# Altium PCB PCB.PcbDoc
Units mil, origin at the board's own origin, x right, y up, seen from the top; angles counter-clockwise.
Board outline 3290 x 2165 mil, 2 copper layers (Top Layer, Bottom Layer); 27 components, 32 nets, 114 pads, 2 vias.
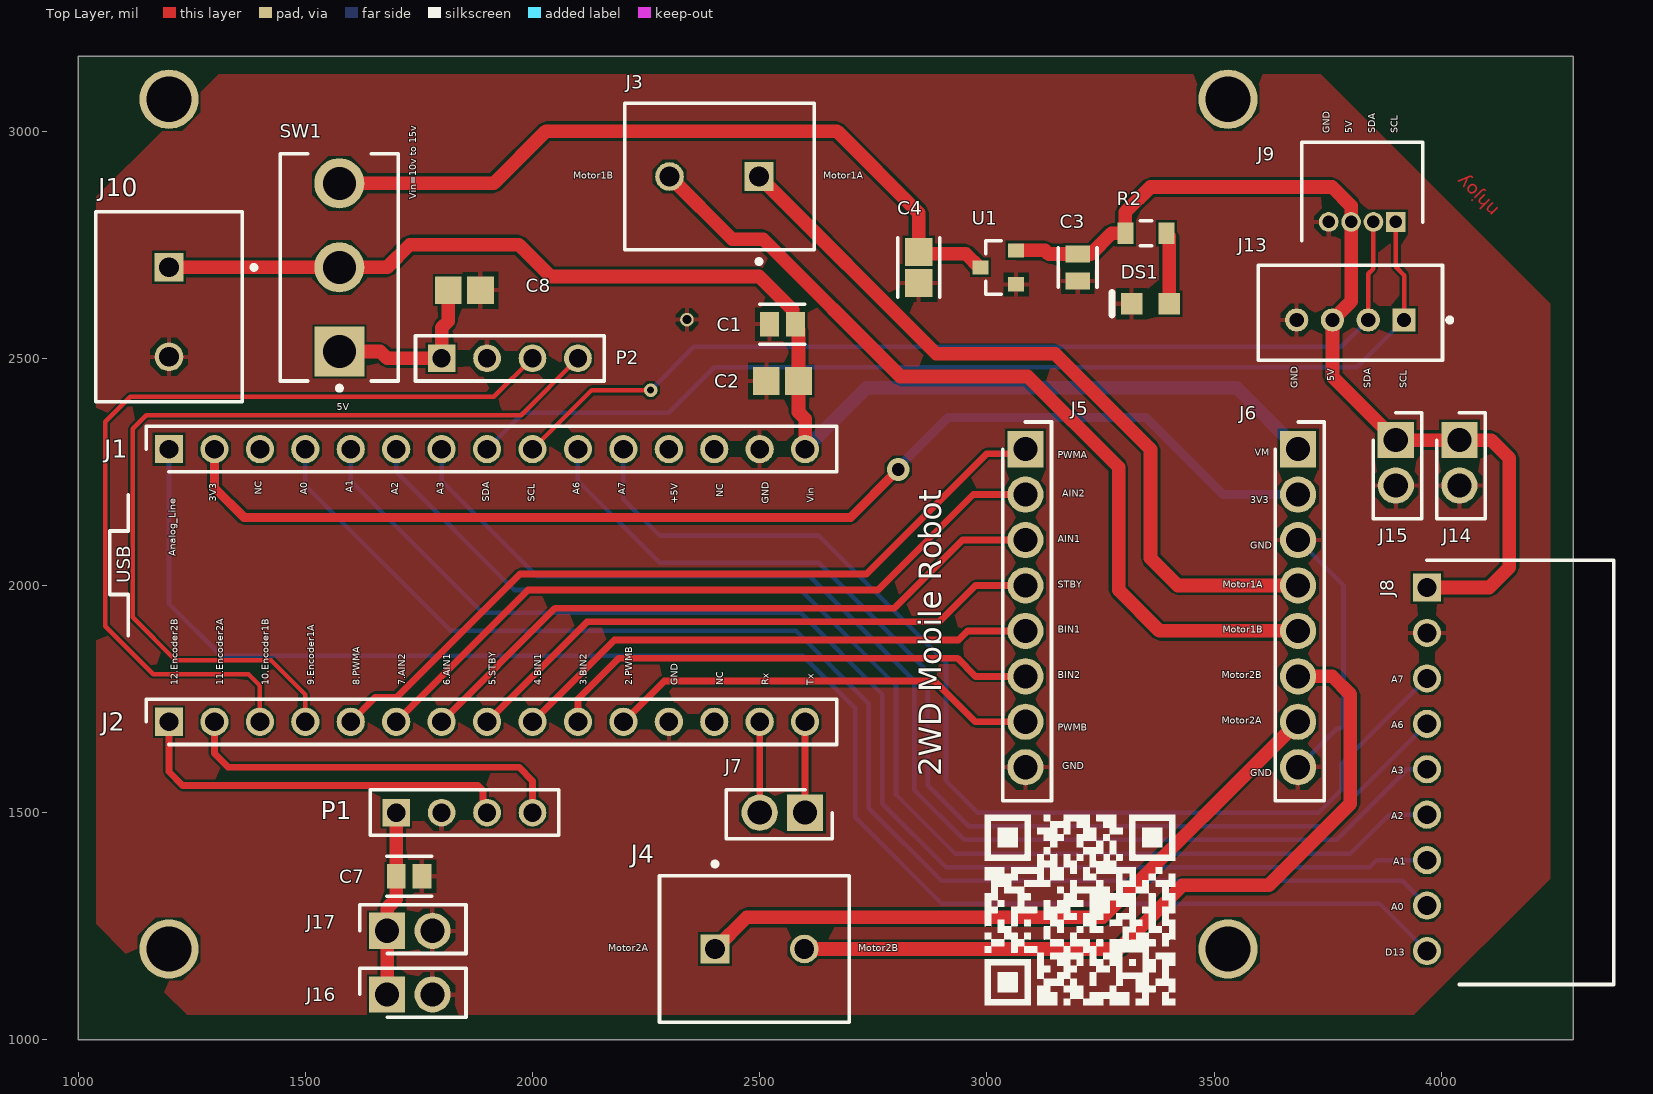
[diagram p0: Top Layer view]
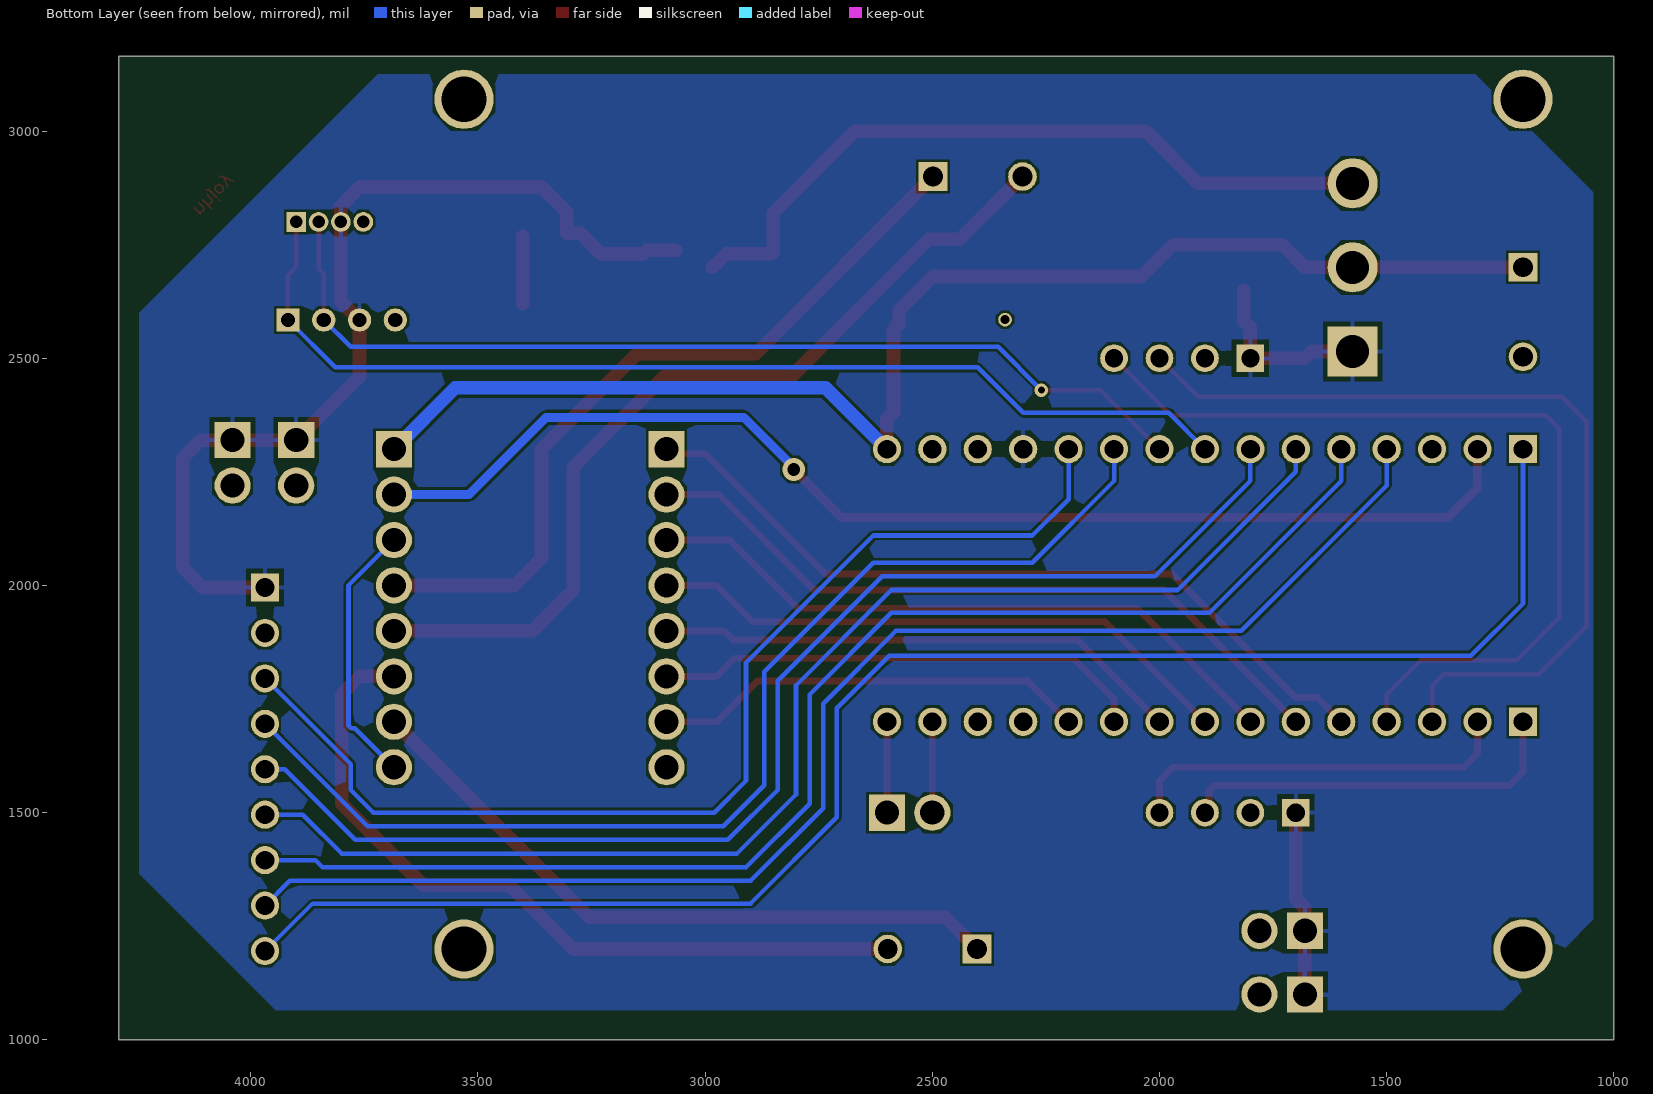
[diagram p1: Bottom Layer view, seen from below]
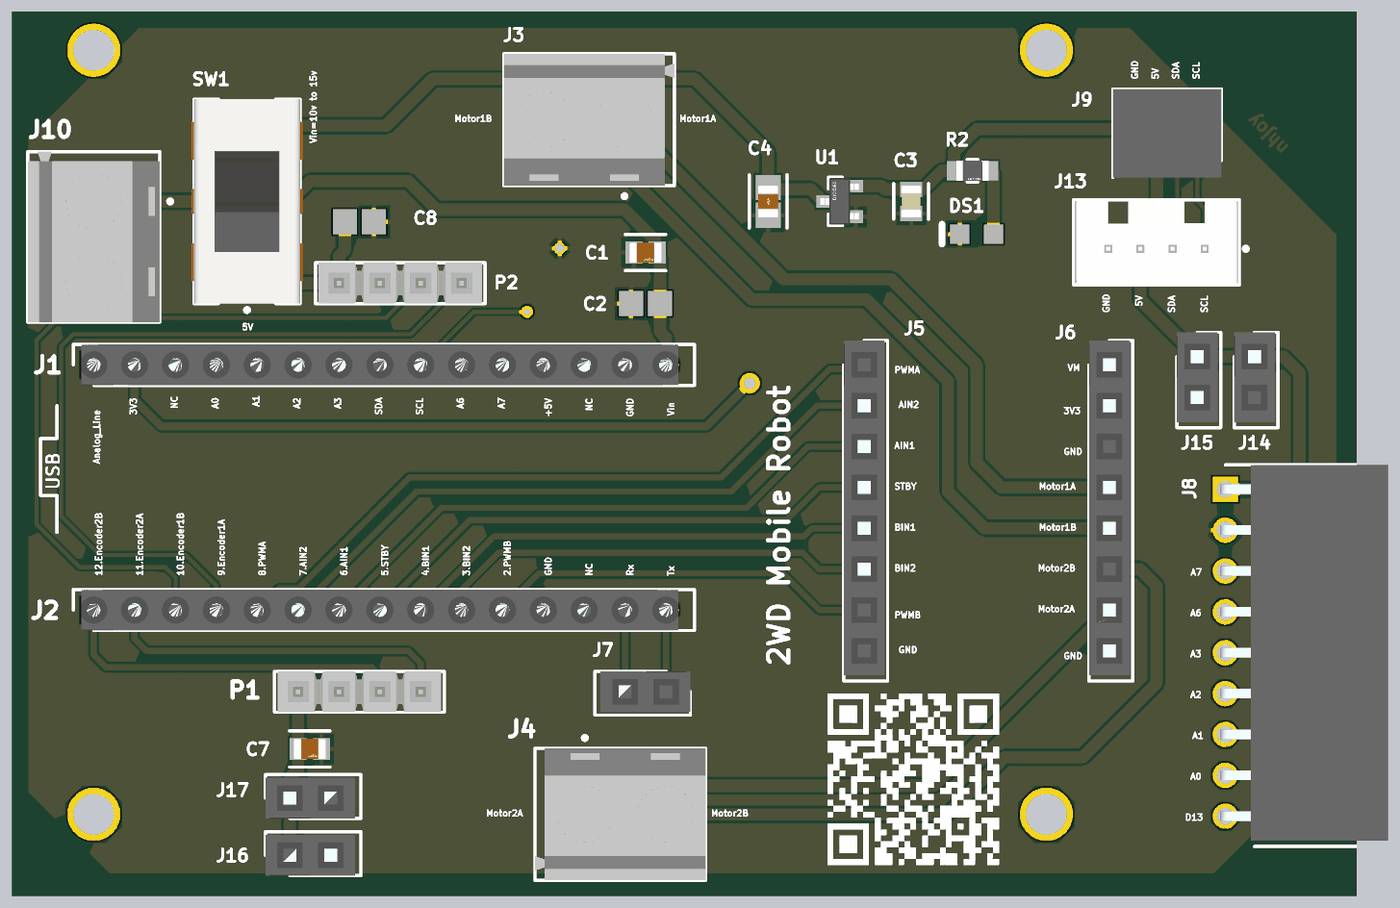
[diagram p2: 3D render of the assembled board from above, using the file's embedded part models]

## Layer stack, top to bottom
Top Solder: solder mask 0.4, Solder Resist, Dk 3.5
Top Layer: signal copper 1.4
Dielectric 1: dielectric 12.6, FR-4, Dk 4.8
Bottom Layer: signal copper 1.4
Bottom Solder: solder mask 0.4, Solder Resist, Dk 3.5

## Board outline
1000,1000 4290,1000 4290,3165 1000,3165

## Design rules (kind name [scope] priority, off if disabled: settings)
Clearance [All] p1: gap=5 ignorepadtopadclearanceinfootprint=TRUE
MinimumAnnularRing [All] p1: minimumring=3
MinimumSolderMaskSliver [All] p1: minsoldermaskwidth=3
PolygonConnect [All] p1: connectstyle=Relief reliefconductorwidth=10 reliefentries=4 polygonreliefangle="90 Angle" airgapwidth=10
RoutingVias [All] p1: holewidth=28 width=50 viastyle="Through Hole" minholewidth=28 minwidth=50 maxholewidth=28 maxwidth=50
ShortCircuit ShortCircuit_1 [All] p1: allowed=FALSE
ShortCircuit [All] p2: allowed=FALSE
SilkToSilkClearance [All] p1: silktosilkclearance=5
SilkToSolderMaskClearance [IsPad] p1: minsilkscreentomaskgap=5 clearancetoexposedcopper=TRUE
SolderMaskExpansion [All] p1: expansion=4 istentingtop=FALSE
Width [All] p1: maxlimit=30 minlimit=10 preferedwidth=15
26 further rules are at their usual default settings.

## Classes and differential pairs
component class Power: C3 C4 DS1 J10 J14 J15 J16 J17 R2 SW1 U1
component class Main: C1 C2 C7 C8 J2 J3 J4 J5 J6 J7 J8 J9 J13 P1 P2

## Components (designator, comment, footprint, x,y, rotation, side; value= is the part's Value field where it differs from the comment)
C1 "10uF" FP-GRM21B-0_2-e0_2_0_7-IPC_C 2550,2575 r0 top
C2 "0.1 µF" CAPC2013X140X50ML20T25 2550,2450 r180 top
C3 "10uF, 10V" FP-C0805C-DG-MFG 3200,2700 r270 top value=10uF
C4 "1uF, 50V" FP-C2012-125-0_2-IPC_A 2850,2700 r270 top
C7 "10uF" FP-GRM21B-0_2-e0_2_0_7-IPC_C 1728.57,1360 r0 top
C8 "0.1 µF" CAPC2013X140X50ML20T25 1850,2650 r180 top
DS1 "HSMG-C170" AVAG-HSMX-C170_V 3360,2620 r180 top
J1 "PPTC151LFBN-RC" RHDR15W85P0X254_1X15_3708X254X850P 1200,2300 r0 top
J2 "PPTC151LFBN-RC" RHDR15W85P0X254_1X15_3708X254X850P 1200,1700 r0 top
J3 "282836-2" TECO-282836-2_V 2400,2900 r180 top
J4 "282836-2" TECO-282836-2_V 2500,1200 r0 top
J5 "PPTC081LFBN-RC" RHDR8W80P0X254_1X8_2082X254X850P 3085,2300 r270 top
J6 "PPTC081LFBN-RC" RHDR8W80P0X254_1X8_2082X254X850P 3685,2300 r270 top
J7 "PPPC021LFBN-RC" RHDR2W80P0X254_1X2_558X254X850P 2600,1500 r180 top
J8 "PPPC091LGBN-RC" RHDRRA9W60P0X254_1X9_2336X850X274P 3968.5,1995.47 r270 top
J9 "0530480410" SHDRRA4W35P0X125_1X4_675X550X350P 3900,2800 r0 top
J10 "282836-2" TECO-282836-2_V 1200,2601.57 r270 top
J13 "110990030" FP-110990030-MFG 3800,2600 r180 top
J14 "PPPC021LFBN-RC" RHDR2W80P0X254_1X2_558X254X850P 4040,2320 r270 top
J15 "PPPC021LFBN-RC" RHDR2W80P0X254_1X2_558X254X850P 3900,2320 r270 top
J16 "PPPC021LFBN-RC" RHDR2W80P0X254_1X2_558X254X850P 1680,1100 r0 top
J17 "PPPC021LFBN-RC" RHDR2W80P0X254_1X2_558X254X850P 1680,1240 r0 top
P1 "TSW-104-08-G-S" SMTC-TSW-104-08-X-S 1700,1500 r0 top
P2 "TSW-104-08-G-S" SMTC-TSW-104-08-X-S 1800,2500 r0 top
R2 "RC2012F331CS" FP-RC2012-MFG 3350,2775 r0 top
SW1 "1101M2S3CQE2" FP-1101M2S3CQE2-MFG 1575,2700 r90 top
U1 "ZXTR2105F-7" FP-SOT23-MFG 3025,2700 r180 top

## Footprints (in the part's own frame and the unit in brackets; to place one, negate y for a bottom-side part, rotate by r counter-clockwise, add the part's x,y. Pads: shape width x height; smd on the part's side, far side on the other; paste and mask are expansions set on the pad)
AVAG-HSMX-C170_V [mm] "SMD, 2-Leads, Body 2x1.25mm, Height 0.8mm"
  rect 1.2x1.2 smd: 1(-1.05,0) 2(1.05,0)
  silkscreen extent 2.15,-0.62 2.15,0.62, body extent -1,-0.63 1,0.63, height 0.8
CAPC2013X140X50ML20T25 [mm] "Chip Capacitor, 2-Leads, Body 2.00x1.25mm, IPC Low Density"
  rect 1.5x1.55 smd: 1(-0.9,0) 2(0.9,0)
  body extent -1.1,-0.72 1.1,0.72, height 1.4
FP-1101M2S3CQE2-MFG [mm]
  rect 2.8x2.8 hole 1.85 paste-1000 mask+0: 1(-4.7,0)
  round 2.8 hole 1.85 paste-1000 mask+0: 2(0,0) 3(4.7,0)
  silkscreen extent -6.87,-3.3 6.35,3.3, body extent -6.45,-3.4 6.45,3.4, height 0.25
FP-110990030-MFG [mm]
  rect 1.3x1.3 hole 0.8 paste-1000 mask+0: 1(-3,0.4)
  round 1.3 hole 0.8 paste-1000 mask+0: 2(-1,0.4) 3(1,0.4) 4(3,0.4)
  silkscreen extent -5.68,-2.65 5.15,2.65, body extent -5.25,-2.75 5.25,2.75, height 0.25
FP-C0805C-DG-MFG [mm]
  rect 0.95x1.35 smd paste+0 mask+0: 1(-0.75,0) 2(0.75,0)
  silkscreen extent -1.11,-1.08 1.1,1.07, body extent -1.4,-0.85 1.4,0.85, height 0.25
FP-C2012-125-0_2-IPC_A [mil]
  rect 62.13x61.27 smd paste+0 mask+0: 1(-34.02,0) 2(34.02,0)
  silkscreen extent -65,-46 65,46, body extent -85,-50 85,50, height 10
FP-GRM21B-0_2-e0_2_0_7-IPC_C [mil]
  rect 41.52x53.39 smd paste+0 mask+0: 1(-28.57,0) 2(28.57,0)
  silkscreen extent -49,-44 49,44, body extent -53,-32 53,32, height 10
FP-RC2012-MFG [mm]
  rect 0.9x1.2 smd paste+0 mask+0: 1(-1.15,0) 2(1.15,0)
  silkscreen extent -0.33,-0.7 0.33,0.7, body extent -1.7,-0.8 1.7,0.8, height 0.25
FP-SOT23-MFG [mm]
  rect 0.9x0.8 smd paste+0 mask+0: 1(-1,0.95) 2(-1,-0.95) 3(1,0)
  silkscreen extent -0.18,-1.5 0.7,1.5, body extent -1.55,-1.6 1.55,1.6, height 0.25
RHDR2W80P0X254_1X2_558X254X850P [mm]
  rect 2.025x2.025 hole 1.35: 1(0,0)
  round 2.025 hole 1.35: 2(2.54,0)
  silkscreen extent -1.52,-1.27 4.41,1.46, body extent -1.52,-1.27 4.06,1.27, height 8.5
RHDR8W80P0X254_1X8_2082X254X850P [mm]
  rect 2.025x2.025 hole 1.35: 1(0,0)
  round 2.025 hole 1.35: 2(2.54,0) 3(5.08,0) 4(7.62,0) 5(10.16,0) 6(12.7,0) 7(15.24,0) 8(17.78,0)
  silkscreen extent -1.52,-1.27 19.65,1.46, body extent -1.52,-1.27 19.3,1.27, height 8.5
RHDR15W85P0X254_1X15_3708X254X850P [mm]
  rect 1.575x1.575 hole 1.05: 1(0,0)
  round 1.575 hole 1.05: 2(2.54,0) 3(5.08,0) 4(7.62,0) 5(10.16,0) 6(12.7,0) 7(15.24,0) 8(17.78,0) 9(20.32,0) 10(22.86,0) 11(25.4,0) 12(27.94,0) 13(30.48,0) 14(33.02,0) 15(35.56,0)
  silkscreen extent -1.27,-1.27 37.33,1.27, body extent -0.76,-1.27 36.32,1.27, height 8.5
RHDRRA9W60P0X254_1X9_2336X850X274P [mm]
  rect 1.575x1.575 hole 1.05: 1(0,0)
  round 1.575 hole 1.05: 2(2.54,0) 3(5.08,0) 4(7.62,0) 5(10.16,0) 6(12.7,0) 7(15.24,0) 8(17.78,0) 9(20.32,0)
  silkscreen extent -1.52,0 22.19,10.45, body extent -1.52,-0.3 21.84,10.1, height 2.74
SHDRRA4W35P0X125_1X4_675X550X350P [mm]
  rect 1.1x1.1 hole 0.7: 1(0,0)
  round 1.1 hole 0.7: 2(-1.25,0) 3(-2.5,0) 4(-3.75,0)
  silkscreen extent -5.25,-1.05 1.5,4.45, body extent -5.25,-1.05 1.5,4.45, height 3.5
SMTC-TSW-104-08-X-S [mm] ".025 SQ Post Terminal Strip Assembly, 1x4 Pins, Vertical, 2.54mm Pitch, Male"
  rect 1.55x1.55 hole 1.02: 1(0,0)
  round 1.55 hole 1.02: 2(2.54,0) 3(5.08,0) 4(7.62,0)
  silkscreen extent -1.46,-1.27 9.08,1.27, body extent -1.27,-1.27 8.89,1.27, height 8.38
TECO-282836-2_V [mm] "Female Header, Pitch 5mm, 1 x 2 Position, Height 10mm"
  rect 1.6x1.6 hole 1.1: 1(-2.5,0)
  round 1.6 hole 1.1: 2(2.5,0)
  silkscreen extent -5.6,-4.1 5,4.87, body extent -5.6,-4.1 5,4.1, height 10

## Part data
C1 C7: library part CMP-06035-048920-1, "Chip Multilayer Ceramic Capacitors for General Purpose, 0805, 10uF, X5R, 15%, 10%, 35V", Case Code (Imperial)=0805, Case Code (Metric)=2012, Dielectric=X5R, Manufacturer Product Number=GRM21BR6YA106KE43L, Max Operating Temperature=85°C, Min Operating Temperature=-55°C, Package Quantity=3000, Tolerance=10%, Voltage Rating=35V, Capacitance=10uF, Case/Package=0805, Height=1.25mm, Lead Free="Lead Free", Length=0.079inch, Mount="Surface Mount", Packaging="Tape and Reel", REACH SVHC="No SVHC", Termination=SMD/SMT, Thickness=0.057inch, Voltage Rating (DC)=35V, Weight=0.000335oz, Width=0.049inch
C2 C8: library part CMP-2007-04651-1, "0.1 µF ±10% 35V Ceramic Capacitor X5R 0805 (2012 Metric)", Manufacturer="AVX Interconnect / Elco", Part Number=0805DD104KAT2A
C3: library part CMP-2007-03243-2, "CAP CER 10UF 10V X5R 0805", 3DS Part Number=220-00001, Capacitance=10uF, Manufacturer=Kemet, Manufacturer Part Number=C0805C106K8PACTU, Manufacturer Product Number=C0805C106K8PAC7800, Package=C0805C-DG, Temperature="-55°C to +85°C", Temperature Characteristic=X5R, Temperature Coefficient=15%, Temperature Range High=+85°C, Temperature Range Low=-55°C, Tolerance=10%, Voltage=10V, Automotive=No, Category=Cap, ComponentLink2Description=Datasheet, ComponentLink2URL=https://content.kemet.com/datasheets/KEM_C1006_X5R_SMD.pdf, Device Class L1="Passive Components", Device Class L2=Capacitors, Device Class L3="Ceramic Capacitors", Digikey Description="CAP CER 10UF 10V X5R 0805", Height=1.4mm, Ipc Land Pattern Name=CAPC200125X125, Lead Free=Yes, Material=Ceramic, Mouser Description="CAP CER 10UF 10V X5R 0805", Octopart=https://octopart.com/c0805c106k8pactu-kemet-98697, RoHS=TRUE, Voltage Rating=10V
C4: library part CMP-08246-005414-1, "Multilayer Ceramic Capacitors 1μF ±10% 50V JB SMD 0805", Capacitance=1uF, Case Code (Imperial)=0805, Case Code (Metric)=2012, Dielectric Material=Ceramic, Manufacturer Product Number=C2012JB1H105K125AB, Max Operating Temperature=85°C, Min Operating Temperature=-25°C, Package Quantity=2000, Tolerance=10%, Voltage Rating=50V, Case/Package=0805, Height=1.25mm, Lead Free="Lead Free", Length=0.079inch, Mount="Surface Mount", Packaging="Tape and Reel", Resistor Type=Ceramic, RoHS Compliant=Yes, Series=C, Termination=SMD/SMT, Thickness=0.057inch, Voltage Rating (DC)=50V, Width=0.049inch
DS1: library part CMP-2000-05062-1, "Chip LED, Green, 2.2 V, -40 to 85 degC, 2-Pin SMD, Pb-Free, Tape and Reel", Forward Current If=20mA, Forward Voltage=2.2V, Forward Voltage VF Max=2.6V, LED Colour=Green, Manufacturer=Avago, Operating Temperature Max=85degC, Operating Temperature Min=-30degC, Operating Temperature Range=-30degCto+85degC, Opto Case Style=SMD, Package Description="2-Pin Surface Mount Device, Body 2 x 1.25 mm, Height 0.8 mm", Package Reference=HSMX-C170, Storage Temperature Min=-40degC, Bulb Size=1.25mmx1.4mm, Datasheet URL=https://datasheet.ciiva.com/29280/180495-da-01-en-chip-led-hsmg-c170-gelb-gruen-29280971.pdf, Datasheet Version=Oct-08, Dominant Wavelength=572nm, Dominant Wavelength Typ=572nm, External Depth=0.8mm, External Length / Height=2mm, External Width=1.25mm, Forward Current If Max=20mA, LED Mounting=SMD, LED Type=Standard, Lens Shape=Rectangular, Light Area Height=1mm, Luminous Intensity=15mcd, Luminous Intensity Min=4mcd, Luminous Intensity Typ=15mcd, Manufacturer URL=http://www.avagotech.com/, Mounting Type=SMD, MSL=MSL2A-4weeks, No. of Pins=2, Opto Mounting Orientation=Top, Packaging=CutTape, Peak Forward Current=20mA, Peak Wavelength=570nm, PIV Max=5V, Storage Temperature Max=85degC, SVHC=NoSVHC(16-Jun-2014), Viewing Angle=170deg, Voltage Vf Typ=2.2V, Wavelength Typ=570nm
J1 J2 J5 J6 J7 J8 J14 J15 J16 J17: "Connector", Manufacturer_Name=Sullins
  J1 J2: Datasheet Link=https://www.digikey.com/en/products/detail/sullins-connector-solutions/PPTC151LFBN-RC/810153, Height=8.5mm, Manufacturer_Part_Number=PPTC151LFBN-RC
  J5 J6: Datasheet Link=http://sullinscorp.com/catalogs/101_PAGE114-115_.100_FEMALE_HDR.pdf, Height=8.5mm, Manufacturer_Part_Number=PPTC081LFBN-RC
  J7 J14 J15 J16 J17: Datasheet Link=http://www.sullinscorp.com/drawings/78_P(N)PxCxxxLFBN-RC,_10492-H.pdf, Height=8.5mm, Manufacturer_Part_Number=PPPC021LFBN-RC
  J8: Datasheet Link=http://www.sullinscorp.com/drawings/78_P(N)PxCxx1LGBN-RC,_10493-G.pdf, Height=2.74mm, Manufacturer_Part_Number=PPPC091LGBN-RC
J3 J4 J10: library part CMP-1684-00017-1, "Female Header, Pitch 5 mm, 1 x 2 Position, Height 10 mm, Tail Length 3.5 mm, Rohs, Bulk", Color=Green, Current=13.5A, Manufacturer="TE Connectivity", Package Description="Female Header, Pitch 5 mm, 1 x 2 Position, Height 10 mm, Tail Length 3.5 mm", Package Reference=THD, Standard Package=300, Voltage=300V, 3D Model=282836-2.pdf, Category=Connectors,Interconnects, Clamp Material - Plating=Brass-NickelPlated, Contact Material - Plating=Brass-TinPlated, Datasheet URL=http://www.te.com.cn/commerce/DocumentDelivery/DDEController?Action=showdoc&DocId=Catalog+Section%7F1308389_EUROSTYLE_TERMINAL_BLOCKS%7F0607%7Fpdf%7FEnglish%7FENG_CS_1308389_EUROSTYLE_TERMINAL_BLOCKS_0607.pdf%7F282836-2, Dynamic Catalog=BuchananSeries, Family=TerminalBlocks-WiretoBoard, Featured Product=EurostyleTerminalBlockConnectors, Features=Interlocking(Side), Housing Material=Polyamide(PA66),Nylon6/6, Manufacturer URL=http://www.te.com, Mating Orientation=HorizontalwithBoard, Mounting Type=ThroughHole, Number of Levels=1, Other Names="5ULV-02B / A98076", Packaging=Bulk, Pitch="0.197\"(5.00mm)", Positions Per Level=2, Product Training Modules=Wire-to-BoardEurostyleTerminalBlocks, RoHS Information=282836-2StatementofCompliance, Screw Material - Plating=Brass-NickelPlated, Screw Thread=M3, Series=Buchanan, Torque - Screw=0.68Nm(6Lb-In), Wire Gauge=16-30AWG, Wire Termination=Screw-RisingCageClamp
J9: "Connector", Manufacturer_Name=Molex, Mouser Part Number=N/A, Arrow Part Number=0530480410, Arrow Price/Stock=https://www.arrow.com/en/products/0530480410/molex, Datasheet Link=http://www.molex.com/pdm_docs/sd/530480410_sd.pdf, Height=3.5mm, Manufacturer_Part_Number=0530480410, Mouser Price/Stock=https://www.mouser.co.uk/ProductDetail/Molex/0530480410?qs=PBcRNPEHKsr6e1Q9gctk8A%3D%3D
J13: library part CMP-139044-000001-1, "GROVE 2MM 4PIN VERT CONN 10PCS", Series=-
P1 P2: library part CMP-1024-00357-1, "0.025\" SQ Post Header, Through-hole, Vertical, -55 to 125 degC, 2.54 mm Pitch, 4-Pin, Male, RoHS", Manufacturer=Samtec, Temperature Range="-55 to 125 degC", ComponentLink1Description="Manufacturer URL", ComponentLink1URL=http://www.samtec.com, ComponentLink2Description=Datasheet, ComponentLink2URL=http://www.samtec.com/documents/webfiles/pdf/TSW_TH.PDF, ComponentLink3Description="Package Specification", ComponentLink3URL=http://www.samtec.com/documents/webfiles/cpdf/TSW-XXX-XX-XXX-X-XX-XXX-MKT.pdf, DatasheetVersion=F-214, Mounting Technology=Through-hole, Orientation=Vertical, PackageDescription=".025[0.64] SQ. Post Terminal Strip Assembly", PackageReference=TSW-104-08-X-S, PackageVersion="DM, 8/1988", PartNumber=TSW-104-08-G-S, Pitch="2.54 mm", RoHS=True
R2: library part CMP-13261-000745-1, "Res Thick Film 0805 330Ω 1% 0.125W ±100ppm/°C Molded SMD T/R", Case Code (Imperial)=0805, Case Code (Metric)=2012, Max Operating Temperature=155°C, Max Power Dissipation=125mW, Min Operating Temperature=-55°C, Package Quantity=1, Resistance=330R, Temperature Coefficient=100ppm/°C, Tolerance=1%, Voltage Rating (DC)=150V, Case/Package=0805, Composition="Thick Film", Contact Plating=Tin, Depth=1.25mm, Features="Moisture Resistant", Height=0.024inch, Lead Free="Lead Free", Length=0.079inch, Military Standard=Not, Number of Terminations=2, Packaging="Tape and Reel", Power Rating=125mW, Radiation Hardening=No, Width=0.049inch
SW1: library part CMP-10038-000019-1, "SWITCH SLIDE SPDT 6A 120V", Actuator Color=Black, Contact Current Rating=6A, Contact Resistance=10mR, Flammability Rating="UL94 V-0", Insulation Resistance=1GR, Max Operating Temperature=65°C, Max Voltage Rating (AC)=250V, Max Voltage Rating (DC)=28V, Min Operating Temperature=-30°C, Package Quantity=1, Voltage Rating (AC)=120V, Actuator Length=5.08mm, Actuator Material=Nylon, Actuator Type=Standard, Approvals=UL, Body Material="Stainless Steel", Contact Material=Copper, Contact Plating=Silver, Current Rating=6A, Depth=6.6mm, Electrical Life=40000Cycles, Housing Material="Stainless Steel", Lead Free="Lead Free", Length=12.7mm, Max Current Rating=6A, Mount="Through Hole", Number of Poles=1, Number of Positions=3, Orientation=Vertical, Packaging=Bulk, REACH SVHC="No SVHC", Series=1000, Switch Function=On-On, Switch Travel=2.16mm, Termination="PC Pins", Throw Configuration=SPDT, Voltage Rating (DC)=28V
U1: library part CMP-12756-000045-1, "IC REG LINEAR 5V 89MA SOT23", Case/Package=TO-236-3, Max Input Voltage=60V, Max Operating Temperature=150°C, Max Power Dissipation=625mW, Min Input Voltage=7V, Min Operating Temperature=-65°C, Output Current=15mA, Output Voltage=5V, Package Quantity=3000, Lead Free="Lead Free", Mount="Surface Mount", Number of Outputs=1, Number of Pins=23, Number of Regulators=1, Output Type=Fixed, Packaging="Tape and Reel", RoHS Compliant=Yes

## Free pads (board coordinates)
  round 130 hole 100: 9(1200,3070.08) 10(3530.71,3070.08) 11(1200,1200) 12(3530.71,1200)
  round 30 hole 20: 13(2340,2585)

## Via types
v1: diameter 50, hole 28, Top Layer to Bottom Layer, 1 vias
v2: diameter 30, hole 15, Top Layer to Bottom Layer, 1 vias

## Nets (pads, with @x,y where several pads share a name; then routed paths per layer and width w, separated by ;. In a path a pad name is that pad's centre, name@x,y a point inside that pad or via, vN(x,y) a via of type N, cw(c..) or ccw(c..) an arc to the next point about the centre after c; other vN are vias at no path point)
3V3: J1.2 J6.2 | length 2654.3
  Top Layer w20: J1.2 1300,2215 1365,2150 2700,2150 v1@2800,2250
  Bottom Layer w20: v1(2805,2255) 2805,2260 2915,2370 3350,2370 3520,2200 J6.2
+5: C3.1 C7.1 C8.2 J1.12 J8.1 J9.3 J13.3 J14.1 J15.1 J16.1 J17.1 P1.1 P2.1 R2.1 SW1.1 U1.2 | length 2938.3
  Top Layer w30: SW1.1 1665.04,2514.96 1680,2500 P2.1 1800,2567 1814.57,2581.57 C8.2 ; J16.1 J17.1 1680,1290 1700,1310 C7.1 P1.1 ; U1.2 3128,2737.4 3135.87,2729.53 C3.1 3229,2729.53 3274.47,2775 R2.1 3304.72,2821.72 3360,2877 3760,2877 3801.57,2835.43 J9.3 3801.57,2625.2 J13.3 3760.63,2459.37 J15.1 J14.1 4110,2320 4150,2280 4150,2040 4105.47,1995.47 J8.1
A0: J1.4 J8.8 | length 3066.2
  Bottom Layer w10: J1.4 1500,2220 1820,1900 2580,1900 2740,1740 2740,1510 2900,1350 3913.98,1350 J8.8
A1: J1.5 J8.7 | length 2937.6
  Bottom Layer w10: J1.5 1600,2230 1890,1940 2590,1940 2770,1760 2770,1520 2910,1380 3842.09,1380 3857.56,1395.47 J8.7
A2: J1.6 J8.6 | length 2842.4
  Bottom Layer w10: J1.6 1700,2250 1960,1990 2590,1990 2800,1780 2800,1540 2930,1410 3800,1410 3885.47,1495.47 J8.6
A3: J1.7 J8.5 | length 2770.7
  Bottom Layer w10: J1.7 1800,2230 2010,2020 2610,2020 2840,1790 2840,1550 2950,1440 3770,1440 3925.47,1595.47 J8.5
A4: J1.8 J9.1 J13.1 | length 2359.1
  Top Layer w10: J9.1 3900,2701.11 3918.11,2683 J13.1
  Bottom Layer w10: J1.8 1980,2380 2300,2380 2400,2480 3813.86,2480 J13.1
A5: J1.9 J9.2 J13.2 | length 2177.6
  Top Layer w10: J1.9 2130,2430 v2(2260,2430) ; J13.2 3839.37,2686 3850.79,2697.42 J9.2
  Bottom Layer w10: v2(2260,2430) 2355,2525 3780.12,2525 J13.2
A6: J1.10 J8.4 | length 2493.1
  Bottom Layer w10: J1.10 2100,2230 2280,2050 2630,2050 2870,1810 2870,1560 2960,1470 3743.03,1470 J8.4
A7: J1.11 J8.3 | length 2472.4
  Bottom Layer w10: J1.11 2200,2190 2280,2110 2630,2110 2910,1830 2910,1570 2980,1500 3730,1500 3780,1550 3780,1606.97 J8.3
D2: J2.11 J5.7 | length 959.6
  Top Layer w15: J2.11 2290,1790 2885,1790 2975,1700 J5.7
D3: J2.10 J5.6 | length 1088.8
  Top Layer w15: J2.10 2100,1750 2190,1840 2935,1840 2975,1800 J5.6
D4: J2.9 J5.5 | length 1167.8
  Top Layer w15: J2.9 2180,1880 2937.49,1880 2957.49,1900 2975,1900 J5.5
D5: J2.8 J5.4 | length 1309.3
  Top Layer w15: J2.8 2120,1920 2895,1920 2975,2000 J5.4
D6: J2.7 J5.3 | length 1450.7
  Top Layer w15: J2.7 2050,1950 2796.24,1950 2946.24,2100 J5.3
D7: J2.6 J5.2 | length 1592.1
  Top Layer w15: J2.6 1990,1990 2760,1990 2970,2200 J5.2
D8: J2.5 J5.1 | length 1733.5
  Top Layer w10: J5.1@3075,2290 J5.1
  Top Layer w15: J2.5 1653.17,1753.17 1700.72,1753.17 1972.55,2025 2595,2025 2735,2025 3000,2290 J5.1@3075,2290
D9: J2.4 P2.4 | length 1969.6
  Top Layer w10: J2.4 1500,1760 1425,1835 1215,1835 1120,1930 1120,2345 1150,2375 1975,2375 P2.4
D10: J2.3 P2.3 | length 1921.8
  Top Layer w10: J2.3 1400,1780 1375,1805 1165,1805 1060,1910 1060,2360 1115,2415 1915,2415 P2.3
D11: J2.2 P1.4 | length 864.9
  Top Layer w15: J2.2 1300,1630 1330,1600 1970,1600 2000,1570 P1.4
D12: J2.1 P1.3 | length 870.7
  Top Layer w15: J2.1 1200,1590 1230,1560 1880,1560 1891.19,1548.81 1891.19,1508.81 P1.3
D13: J1.1 J8.9 | length 3565.8
  Bottom Layer w10: J1.1 1200,1960 1315,1845 2595,1845 2710,1730 2710,1490 2900,1300 3863.98,1300 J8.9
GND: C1.1 C2.2 C3.2 C4.2 C7.2 C8.1 DS1.2 J1.14 J2.12 J5.8 J6.3 J6.8 J8.2 J9.4 J10.2 J13.4 J14.2 J15.2 J16.2 J17.2 P1.2 P2.2 pad.13 U1.1 | length 596.2
  Top Layer w30: J1.14 J1.14@2506.12,2306.12
  Bottom Layer w10: J6.8 3771,1686 3779.14,1686 3784.9,1691.76 3784.9,2000.1 J6.3
Motor1A: J3.1 J6.4 | length 1700
  Top Layer w30: J3.1 2888.43,2510 3150,2510 3360,2300 3360,2060 3420,2000 J6.4
Motor1B: J3.2 J6.5 | length 2270.8
  Top Layer w30: J3.2 2439.57,2762 2508,2762 2810,2460 3090,2460 3290,2260 3290,1990 3380,1900 ; 3380,1900 3690,1900 3380,1900
Motor2A: J4.1 J6.7 | length 2122.3
  Top Layer w30: J4.1 2471.57,1270 3255,1270 ; 3255,1270 3693.37,1708.37 3255,1270
Motor2B: J4.2 J6.6 | length 1705.7
  Top Layer w30: J4.2 3290,1200 3430,1340 3620,1340 3800,1520 3800,1760 3760,1800 J6.6
NetC4_1: C4.1 SW1.3 U1.3 | length 1632.9
  Top Layer w30: SW1.3 1915.04,2885.04 2030,3000 2670,3000 2850,2820 C4.1 2854.02,2730 2953.66,2730 2983.66,2700 U1.3
NetDS1_1: DS1.1 R2.2 | length 157.5
  Top Layer w10: R2.2 R2.2@3401.34,2768.94
  Top Layer w30: DS1.1 R2.2@3401.34,2768.94
NetJ2_14: J2.14 J7.2 | length 200
  Top Layer w15: J7.2 J2.14
NetJ2_15: J2.15 J7.1 | length 200
  Top Layer w15: J7.1 J2.15
VIN: C1.2 C2.1 J1.15 J6.1 J10.1 SW1.2 | length 2969.7
  Top Layer w30: J10.1 SW1.2 1680,2700 1730,2750 1970,2750 2040,2680 2499.24,2680 2572.81,2606.43 2572.81,2580.76 C1.2 ; C1.2@2572.81,2574.82 2585.43,2562.2 C2.1 2585.43,2381.57 2600,2367 J1.15
  Bottom Layer w30: J1.15 2735,2435 3550,2435 J6.1
pads on no net: J1.3 J1.13 J2.13

## Polygon pours and split planes (outlines as drawn)
GND on Top Layer "GND_L01_P000" (solid, pour order 0): 1240,1055 3940,1055 4240,1355 4240,2620 3735,3125 1310,3125 1040,2855 1040,1255
+5 on Bottom Layer "+5_L02_P001" (solid, pour order 1): 1245,1065 3945,1065 4245,1365 4245,2600 3720,3125 1305,3125 1045,2865 1045,1265

## Other copper
Top Layer:
  text "nhjoy" at 4128.79,2827.93 h30 r135

## Silkscreen, mask and mechanical layers (free items; w line width, h text height)
Top Overlay:
  drawing of 44 lines, arcs and shapes, not listed
  text "GND" at 3754.5,2995.5 h15 r90
  text "5V" at 3804.5,2995.5 h15 r90
  text "SDA" at 3854.5,2995.5 h15 r90
  text "SCL" at 3904.5,2995.5 h15 r90
  text "Motor1B" at 2089.53,2895.5 h15
  text "Motor1A" at 2639.53,2895.5 h15
  text "Vin=10v to 15v" at 1744.5,2849.56 h15 r90
  text "5V" at 3764.5,2449.51 h15 r90
  text "GND" at 3684.5,2434.51 h15 r90
  text "SDA" at 3844.5,2434.51 h15 r90
  text "SCL" at 3924.5,2434.51 h15 r90
  text "5V" at 1569.51,2385.5 h15
  text "VM" at 3589.51,2285.5 h15
  text "PWMA" at 3155.5,2280.5 h15
  text "A1" at 1604.5,2204.51 h15 r90
  text "NC" at 1404.5,2199.51 h15 r90
  text "A0" at 1504.5,2199.51 h15 r90
  text "A2" at 1704.5,2199.51 h15 r90
  text "A3" at 1804.5,2199.51 h15 r90
  text "A6" at 2104.5,2199.51 h15 r90
  text "A7" at 2204.5,2199.51 h15 r90
  text "AIN2" at 3165.5,2195.5 h15
  text "NC" at 2419.5,2194.51 h15 r90
  text "3V3" at 1304.5,2184.51 h15 r90
  text "SDA" at 1904.5,2184.51 h15 r90
  text "SCL" at 2004.5,2184.51 h15 r90
  text "Vin" at 2619.5,2182.01 h15 r90
  text "+5V" at 2319.5,2179.51 h15 r90
  text "GND" at 2519.5,2179.51 h15 r90
  text "3V3" at 3579.51,2180.5 h15
  text "AIN1" at 3155.5,2095.5 h15
  text "GND" at 3579.51,2080.5 h15
  text "Analog_Line" at 1214.5,2064.55 h15 r90
  text "USB" at 1114.5,2004.53 h30 r90
  text "STBY" at 3155.5,1995.5 h15
  text "Motor1A" at 3519.53,1995.5 h15
  text "BIN1" at 3155.5,1895.5 h15
  text "Motor1B" at 3519.53,1895.5 h15
  text "BIN2" at 3155.5,1795.5 h15
  text "Motor2B" at 3517.03,1795.5 h15
  text "A7" at 3890.48,1785.5 h15
  text "12.Encoder2B" at 1219.5,1780.5 h15 r90
  text "11.Encoder2A" at 1319.5,1780.5 h15 r90
  text "10.Encoder1B" at 1419.5,1780.5 h15 r90
  text "9.Encoder1A" at 1519.5,1780.5 h15 r90
  text "8.PWMA" at 1619.5,1780.5 h15 r90
  text "7.AIN2" at 1719.5,1780.5 h15 r90
  text "6.AIN1" at 1819.5,1780.5 h15 r90
  text "5.STBY" at 1919.5,1780.5 h15 r90
  text "4.BIN1" at 2019.5,1780.5 h15 r90
  text "3.BIN2" at 2119.5,1780.5 h15 r90
  text "2.PWMB" at 2219.5,1780.5 h15 r90
  text "GND" at 2319.5,1780.5 h15 r90
  text "NC" at 2419.5,1780.5 h15 r90
  text "Rx" at 2519.5,1780.5 h15 r90
  text "Tx" at 2619.5,1780.5 h15 r90
  text "Motor2A" at 3517.03,1695.5 h15
  text "A6" at 3889.51,1685.5 h15
  text "PWMB" at 3155.5,1680.5 h15
  text "GND" at 3165.5,1595.5 h15
  text "A3" at 3889.51,1585.5 h15
  text "2WD Mobile Robot" at 2900,1580.24 h50 r90
  text "GND" at 3579.51,1580.5 h15
  text "A2" at 3889.51,1485.5 h15
  text "A1" at 3894.51,1385.5 h15
  text "A0" at 3889.51,1285.5 h15
  text "Motor2A" at 2167.03,1195.5 h15
  text "Motor2B" at 2717.03,1195.5 h15
  text "D13" at 3877.01,1185.5 h15